# EAGLE board EtherCard (EAGLE 6.5.0)
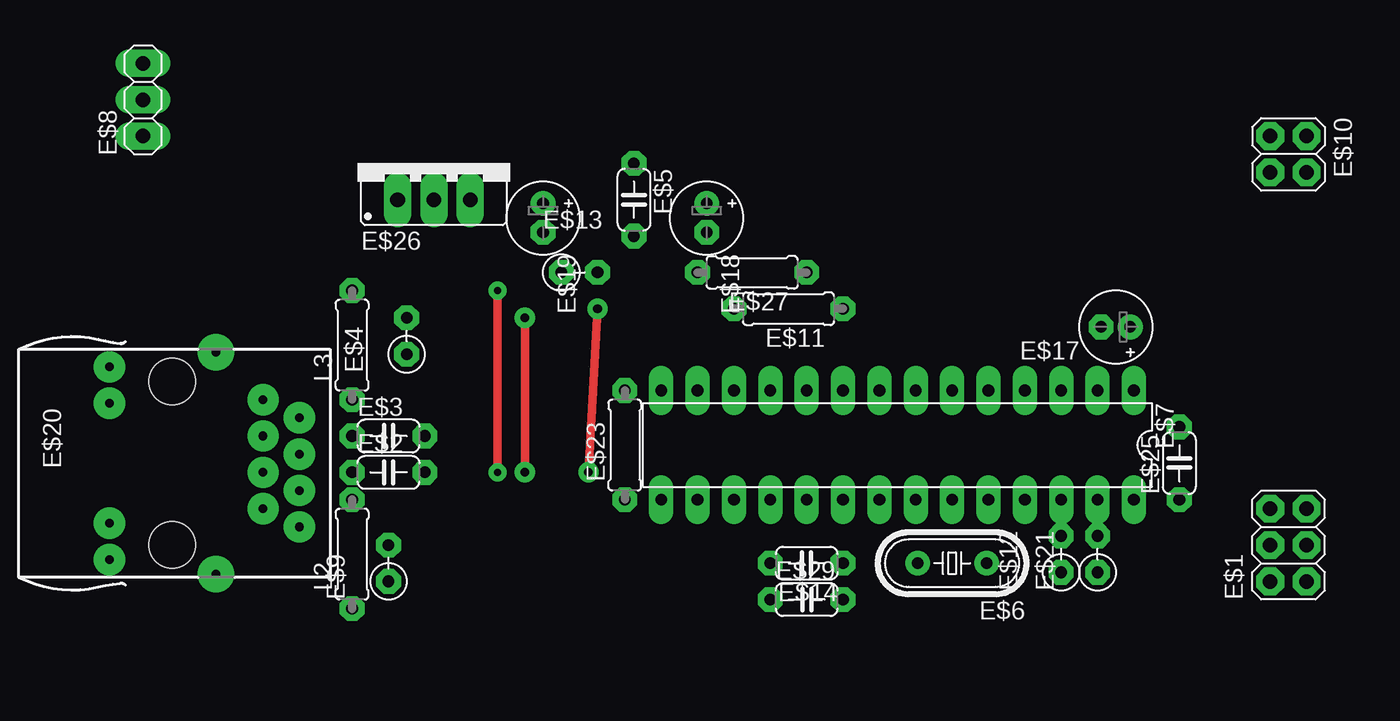
[diagram p0: board, top side]
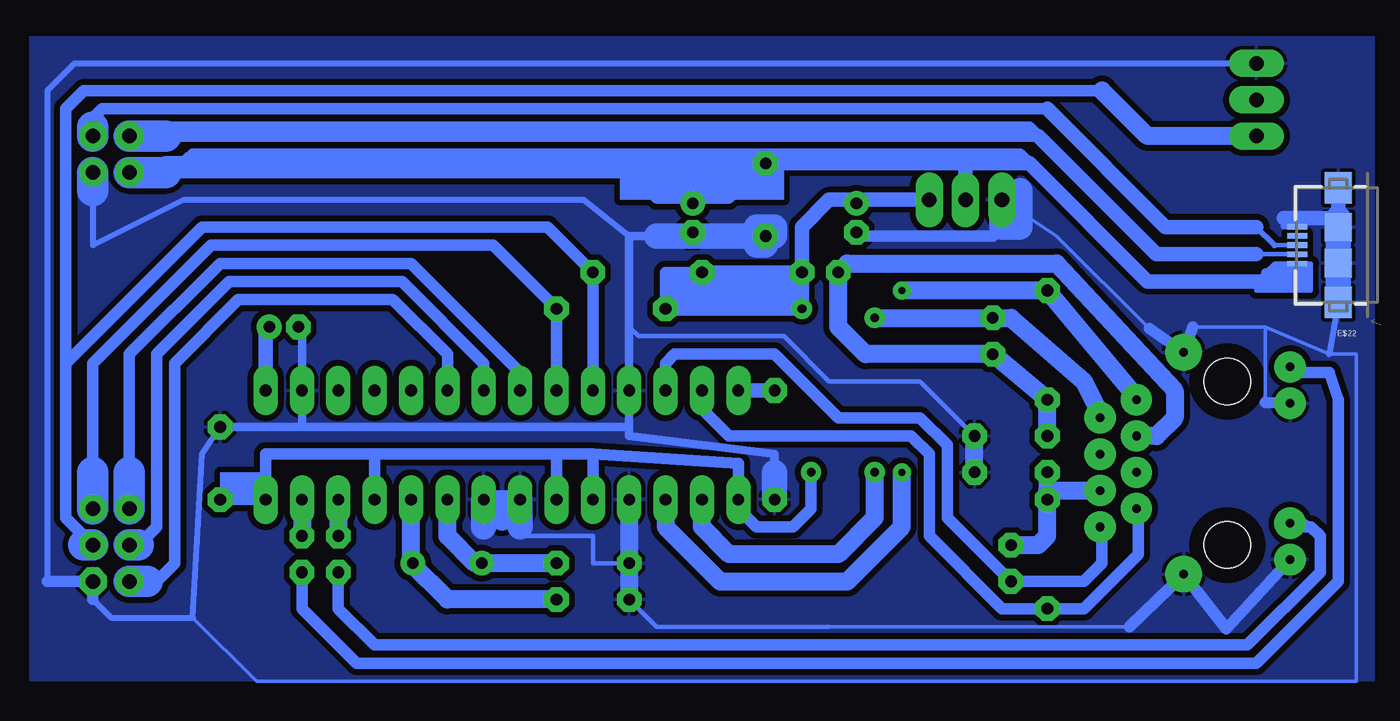
[diagram p1: board, bottom side, seen from below]

No outline drawn. Coordinates in mm, seen from the top.
Copper layers (1*16): Top 0.035mm / dielectric 1.5mm / Bottom 0.035mm
Design rules "default *": minimum track width 10mil, minimum drill 24mil, track to track 8mil, track to pad 8mil, pad to pad 8mil, via to via 8mil, smd to smd 8mil, copper to edge 40mil, drill to drill 8mil, minimum pad ring 18mil, minimum via ring 8mil, stop-mask expansion 4mil, vias tented up to drill 0mil, thermal gap 10mil

## Footprints (pad centres in the part's own frame; a part is rotated, then mirrored left to right if it is on the bottom)
2X03 = drill 1.016 octagon: 1 -2.54,-1.27; 2 -2.54,1.27; 3 0,-1.27; 4 0,1.27; 5 2.54,-1.27; 6 2.54,1.27
C050-024X044 = drill 0.813 octagon: 1 -2.54,0; 2 2.54,0
RS-2,5 = drill 0.813 pad 1.6 octagon: 1 -1.27,0; 2 1.27,0
HC49/S = drill 0.813: 1 -2.413,0; 2 2.413,0
DIL28-3 = drill 0.813 long: 1 -16.51,-3.81; 2 -13.97,-3.81; 3 -11.43,-3.81; 4 -8.89,-3.81; 5 -6.35,-3.81; 6 -3.81,-3.81; 7 -1.27,-3.81; 8 1.27,-3.81; 9 3.81,-3.81; 10 6.35,-3.81; 11 8.89,-3.81; 12 11.43,-3.81; 13 13.97,-3.81; 14 16.51,-3.81; 15 16.51,3.81; 16 13.97,3.81; 17 11.43,3.81; 18 8.89,3.81; 19 6.35,3.81; 20 3.81,3.81; 21 1.27,3.81; 22 -1.27,3.81; 23 -3.81,3.81; 24 -6.35,3.81; 25 -8.89,3.81; 26 -11.43,3.81; 27 -13.97,3.81; 28 -16.51,3.81
1X03 = drill 1.016 long: 1 -2.54,0; 2 0,0; 3 2.54,0
2X02 = drill 1.016 octagon: 1 -1.27,-1.27; 2 -1.27,1.27; 3 1.27,-1.27; 4 1.27,1.27
0207/7 = drill 0.813 octagon: 1 -3.81,0; 2 3.81,0
E2-5 = drill 0.813 pad 1.27: + -1.016,0 | drill 0.813 pad 1.27 octagon: - 1.016,0
SI-50170 = drill 0.6 pad 2.184: 1 4.445,5.842; 2 3.175,3.302; 3 1.905,5.842; 4 0.635,3.302; 5 -0.635,5.842; 6 -1.905,3.302; 7 -3.175,5.842; 8 -4.445,3.302; A1 -6.731,-7.429; A2 4.191,-7.429; C1 -4.191,-7.429; C2 6.731,-7.429 | drill 0.6 pad 2.54: S1 -7.747,0; S2 7.747,0 | hole 3.251: -5.715,-3.048; 5.715,-3.048
USB-AB-MICRO-SMD = smd 1.4 x 0.4: D+ 2.85,0; D- 2.85,0.65; GND 2.85,-1.3; ID 2.85,-0.65; VBUS 2.85,1.3 | smd 1.9 x 2.2: SHIELD1 0,4; SHIELD4 0,-4 | smd 1.9 x 2: SHIELD2 0,1.25; SHIELD3 0,-1.25
78XXS = drill 1.016 long: GND 0,-2.54; IN -2.54,-2.54; OUT 2.54,-2.54

## Placement (x,y rotation side)
E$1  [2X03]  88.27,9.53 90 top
E$2  [C050-024X044]  25.4,14.61 0 top
E$3  [C050-024X044]  25.4,17.14 0 top
E$4  [RS-2,5]  26.67,24.13 90 top
E$5  [C050-024X044]  42.55,33.66 270 top
E$6  [HC49/S]  64.77,8.26 180 top
E$7  [DIL28-3]  60.96,16.51 180 top
E$8  [1X03]  8.26,40.64 90 top
E$9  [RS-2,5]  25.4,8.26 90 top
E$10  [2X02]  88.27,36.83 270 top
E$11  [0207/7]  53.34,26.04 180 top
E$12  [RS-2,5]  72.39,8.89 90 top
E$13  [RS-2,5]  38.73,28.57 0 top
E$14  [C050-024X044]  54.61,8.26 180 top
E$17  [E2-5]  76.2,24.77 180 top
E$18  [E2-5]  47.62,32.38 270 top
E$19  [E2-5]  36.2,32.38 270 top
E$20  [SI-50170]  13.34,15.24 270 top
E$21  [RS-2,5]  74.93,8.89 90 top
E$22  [USB-AB-MICRO-SMD]  2.54,30.48 180 bottom
E$23  [0207/7]  41.91,16.51 90 top
E$25  [C050-024X044]  80.64,15.24 90 top
E$26  [78XXS]  28.57,36.2 0 top
E$27  [0207/7]  50.8,28.57 180 top
E$29  [C050-024X044]  54.61,5.71 0 top
L2  [0207/7]  22.86,8.89 90 top
L3  [0207/7]  22.86,23.5 90 top

## Library data of the parts
E$1 E$8 E$10 = pinhead
E$2 E$3 E$5 E$11 E$14 E$17-E$19 E$23 E$25 E$27 E$29 L2 L3 = rcl
E$4 E$9 E$12 E$13 E$21 = discrete
E$6 = crystal
E$7 = 74ac-logic
E$20 = ARDUINO
E$22 = SparkFun-Connectors
E$26 = v-reg

## Nets
GND: E$1.1 E$2.2 E$3.2 E$5.2 E$7.2 E$7.11 E$7.18 E$7.21 E$7.22 E$8.3 E$10.4 E$14.2 E$20.C1 E$20.C2 E$20.S1 E$20.S2 E$22.GND E$22.SHIELD1 E$22.SHIELD2 E$22.SHIELD3 E$22.SHIELD4 E$23.1 E$25.2 E$26.IN E$29.1
S$1: E$5.1 E$10.3 E$22.VBUS E$26.GND
S$3: E$21.1
S$4: E$7.24 E$29.2
S$6: E$12.1 E$20.A2
S$7: E$2.1 E$9.2
S$9: E$7.14 E$23.2
S$12: E$10.1
S$14: E$7.16 E$20.7
S$15: E$7.23 E$14.1
S$17: E$1.2 E$7.6
S$18: E$10.2
S$19: E$1.4 E$7.7
S$20: E$1.3 E$7.10 E$8.1 E$27.1
S$21: E$3.1 E$4.1
S$22: E$1.5 E$7.9 E$11.1
S$24: E$1.6 E$7.8
S$25: E$7.13
S$26: E$7.17
S$29: E$7.1
S$30: E$7.12
S$32: E$7.15 E$7.19 E$7.20 E$7.25 E$7.28 E$11.2 E$25.1 E$26.OUT E$27.2
S$33: E$7.26 E$12.2
S$34: E$7.27 E$21.2

## Tracks (layer width: path | path; a pad name or v marks a point on that pad's centre or on a via)
GND
  Bottom 0.254: 12.7,24.77 7.62,24.77 | 7.62,24.77 7.62,19.49 | 15.75,24.64 22.23,31.11 E$26.IN | 7.62,24.77 3.17,22.86 1.27,22.86 1.27,0 78.11,0 82.55,4.45 | 17.14,3.81 38.1,3.81
  Bottom 0.305: E$3.2 31.75,20.95 38.1,20.95 41.27,24.13 51.44,24.13 52.07,24.77 | 59.69,10.79 59.69,10.16 54.61,10.16 54.61,8.26 E$14.2 | 38.1,3.81 50.16,3.81 E$29.1
  Bottom 0.406: 92.71,6.99 92.71,41.27 90.81,43.18 E$8.3 | 89.53,5.71 88.27,4.45 82.55,4.45 81.92,15.88 E$25.2 | 89.53,34.29 89.53,30.48 83.19,33.66 55.24,33.66 52.07,31.11 | E$22.GND 6.35,31.78 6.35,32.38 | 2.54,32.38 E$22.SHIELD3 E$22.SHIELD2 2.54,26.67 E$22.SHIELD1 3.17,22.86
  Bottom 0.61: 50.16,31.11 52.07,31.11 52.07,24.77 E$7.11 52.07,17.78 | 74.93,24.77 E$7.2 74.93,17.78 | E$25.2 74.93,17.78 | 74.93,17.78 52.07,17.78 | 52.07,17.78 52.07,17.14 41.91,15.88 41.91,14.61 | E$7.18 E$14.2 E$29.1
  Bottom 0.813: 12.7,24.77 E$20.S1 15.75,24.64 | 7.62,19.49 E$20.C1 | 92.71,6.99 E$1.1 89.53,5.71 | 17.14,3.81 E$20.S2 10.35,3.68 E$20.C2 | E$26.IN 26.04,31.75 26.67,31.11 36.2,31.11
  Bottom 1.016: 6.35,32.38 2.54,32.38 E$22.SHIELD4
  Bottom 1.27: E$7.18 E$29.1 | E$7.21 E$7.22 | E$2.2 E$3.2
  Bottom 1.778: E$23.1 41.91,14.61 | E$7.21 59.69,10.79 | E$7.22 62.23,10.79 | 2.54,26.67 2.54,32.38 | 50.16,31.11 E$5.2 41.91,31.11 41.91,31.75 43.18,31.75 43.18,30.48 42.55,30.48 | 26.04,34.29 26.04,31.75 24.77,31.75 24.77,34.29
  Bottom 2.184: E$10.4 89.53,34.29
  pour Bottom (isolate 0.406): 0,0 93.98,0 93.98,45.09 0,45.09
S$1
  Bottom 0.254: 7.62,27.94 6.99,28.57 6.38,29.18 E$22.VBUS
  Bottom 0.305: 6.99,29.21 4.45,29.21 4.45,27.3 8.26,27.3 8.26,27.94 7.62,28.57 6.99,29.21 | 6.99,29.21 6.99,28.57
  Bottom 0.61: E$5.1 45.09,33.66 50.16,33.66 52.07,35.56 84.45,35.56 | 6.99,28.57 7.62,28.57
  Bottom 0.813: 85.72,35.56 84.45,35.56 43.18,35.56 E$5.1 | 7.62,27.94 8.26,27.94 15.88,27.94 | 24.13,36.2 24.77,36.83 82.55,36.83
  Bottom 1.016: 7.62,27.94 15.88,27.94 24.13,36.2 28.57,36.2 | 28.57,36.2 E$5.1 | E$26.GND 28.57,36.2 | 82.55,36.2 84.45,36.2
  Bottom 1.778: E$5.1 82.55,36.2
  Bottom 2.184: 85.72,35.56 E$10.3 84.45,35.56
S$2
  Bottom 1.778: 60.33,12.06 60.96,11.43
S$3
  Bottom 0.61: 26.67,1.27 71.12,1.27 | 8.26,1.27 27.3,1.27 | 3.17,21.59 5.08,21.59 5.71,22.23 6.35,21.59
  Bottom 0.813: E$21.1 74.93,5.08 71.12,1.27 8.26,1.27 2.54,6.99 2.54,19.68 3.17,21.59 6.35,21.59
S$4
  Bottom 1.27: E$29.2 64.77,5.71 67.31,8.26 E$7.24
S$6
  Bottom 0.61: 69.85,2.54 27.3,2.54 | 8.89,2.54 27.94,2.54 | E$20.A2 5.97,11.68 4.45,10.79
  Bottom 0.813: E$12.1 72.39,5.08 69.85,2.54 8.89,2.54 3.81,7.62 3.81,10.16 4.45,10.79 5.71,10.79
S$7
  Bottom 1.27: E$9.2 23.5,9.53 22.86,10.16 22.86,13.34 | E$2.1 22.86,13.34 | 22.86,13.34 19.05,13.34
S$9
  Bottom 1.016: E$23.2 E$7.14
S$12
  Bottom 0.305: 5.71,29.84 8.26,29.84
  Bottom 0.813: 84.45,38.1 23.5,38.1 24.13,38.73 84.45,38.73
  Bottom 1.016: 8.26,29.84 15.24,29.84 23.5,38.1
  Bottom 2.184: E$10.1 84.45,38.1
S$14  (via drill 0.6 pad 1.42)
  Top 0.61: v34.92,25.4 v34.92,14.61
  Bottom 0.61: E$20.7 20.45,20.83 25.4,25.4
  Bottom 1.27: v34.92,25.4 25.4,25.4 20.32,20.95 19.05,18.41 | v34.92,14.61 34.92,11.43 37.47,8.89 45.09,8.89 46.99,10.79 E$7.16
S$15
  Bottom 1.27: E$14.1 62.87,8.26 64.77,10.16 E$7.23
S$17
  Bottom 0.813: E$7.6 64.77,22.86 68.58,26.67 79.38,26.67 83.82,22.23 83.82,8.26 85.09,6.99 85.72,6.99
  Bottom 2.184: E$1.2 85.72,6.99
S$18
  Bottom 0.305: 5.71,30.48 6.99,30.48
  Bottom 0.406: 6.99,30.48 8.26,31.75
  Bottom 0.813: 22.86,40.01 88.9,40.01 89.53,39.37 89.53,38.73
  Bottom 1.016: 8.26,31.75 14.61,31.75 22.86,40.01
  Bottom 2.184: E$10.2 89.53,38.73
S$19
  Bottom 0.813: 86.36,9.53 85.09,10.79 85.09,22.86 80.01,27.94 67.94,27.94 62.23,22.23 E$7.7
  Bottom 2.184: E$1.4 86.36,9.53
S$20
  Bottom 0.813: E$7.10 E$27.1 57.78,31.75 81.92,31.75 91.44,22.23 | 91.44,22.23 91.44,11.43 E$1.3 | 19.05,41.27 90.17,41.27 91.44,40.01 91.44,22.23
  Bottom 1.27: E$8.1 15.88,38.1 19.05,41.27
  Bottom 2.184: E$1.3 90.17,9.53
S$21
  Bottom 1.27: E$3.1 22.86,19.68 E$4.1 35.56,22.86 37.47,24.77 37.47,28.57 36.83,29.21 22.23,29.21 13.97,20.32 13.97,18.41 15.24,17.14 16.51,17.14
S$22
  Bottom 0.813: E$7.9 E$11.1 61.59,30.48 81.28,30.48 89.53,22.23 89.53,14.61
  Bottom 2.184: E$1.5 89.53,14.61
S$24
  Bottom 0.813: E$7.8 59.69,21.59 67.31,29.21 80.64,29.21 87,22.86 87,14.61
  Bottom 2.184: E$1.6 87,14.61
S$25
  Bottom 0.813: 16.51,12.06 16.51,8.89 20.32,5.08 26.04,5.08 31.11,10.16 31.11,15.88 32.38,17.14 45.09,17.14 46.99,19.05 E$7.13
S$26  (via drill 0.5 pad 1.27)
  Bottom 1.27: E$7.17 49.53,10.79 45.72,6.99 36.83,6.99 33.02,10.79 v33.02,14.61
S$27
  Top 0.61: 33.02,14.61 33.02,27.3
S$28  (via drill 0.5 pad 1.27)
  Bottom 1.27: 16.51,19.68 22.86,27.3 v33.02,27.3
S$29
  Bottom 1.016: E$7.1 77.47,24.77
S$30
  Bottom 0.813: 19.05,10.79 19.05,8.26 20.32,6.99 25.4,6.99 29.84,11.43 29.84,16.51 31.75,18.41 37.47,18.41 41.91,22.86 48.9,22.86 49.53,22.23 E$7.12
S$32  (via drill 0.6 pad 1.42)
  Top 0.61: v40.01,26.04 v39.37,14.61
  Bottom 0.61: 44.45,15.24 E$7.15 44.45,12.06
  Bottom 0.813: v39.37,14.61 39.37,12.06 40.64,10.79 43.18,10.79 44.45,12.06 44.45,15.24 54.61,15.88 | 54.61,15.88 57.15,15.88 | 57.15,15.88 69.85,15.88 | 69.85,15.88 77.47,15.88 E$7.28 E$25.1 | E$7.19 54.61,15.88 | E$7.20 57.15,15.88 | E$7.25 69.85,15.88 | E$27.2 49.53,28.57 E$11.2
  Bottom 1.016: E$26.OUT 38.1,33.66 40.01,31.75 40.01,28.57 | 40.01,28.57 E$27.2 E$11.2 v40.01,26.04 40.01,28.57
S$33
  Bottom 1.016: E$12.2 E$7.26
  Bottom 1.27: 72.39,13.34 E$12.2
S$34
  Bottom 1.27: E$7.27 E$21.2
(copper drawn outside any net)
  shapes: Bottom area x6